# EAGLE board lcd_brd (EAGLE 6.2)
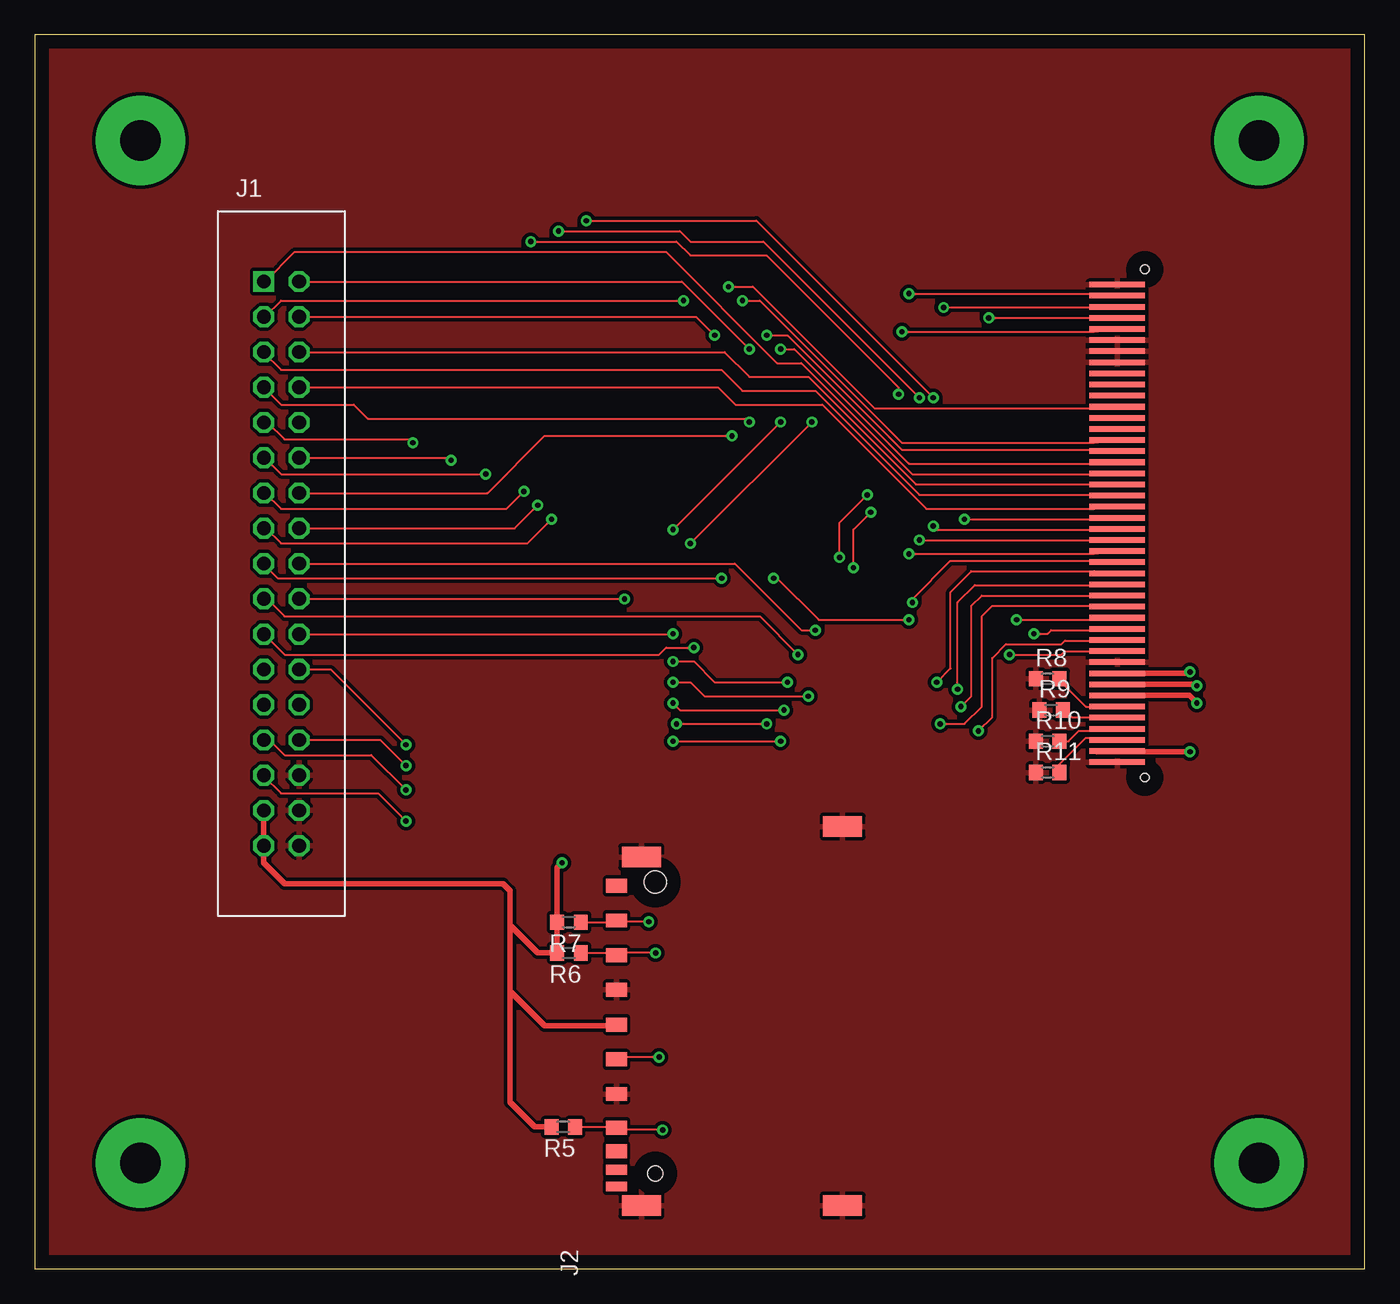
[diagram p0: board, top side]
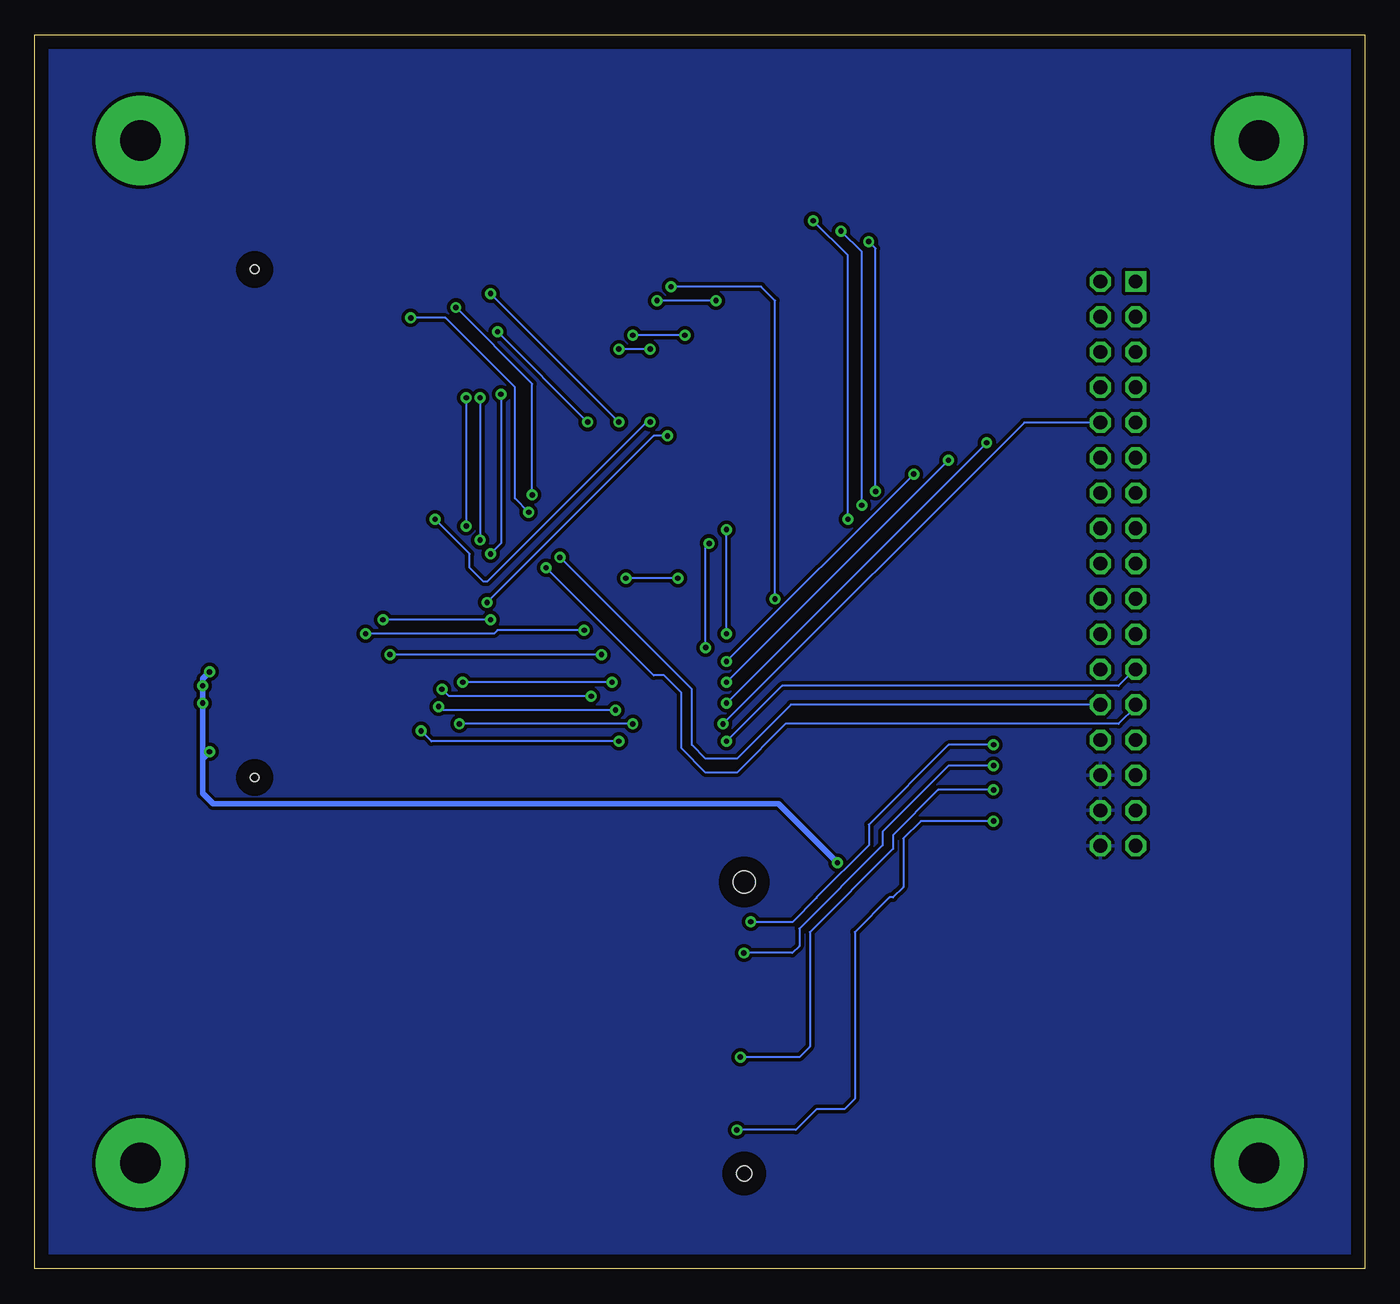
[diagram p1: board, bottom side, seen from below]

Size 95.85 x 88.9 mm. Coordinates in mm from the lower left corner, seen from the top.
Outline: 0,0 95.85,0 95.85,88.9 0,88.9 0,0
Copper layers (1*16): Top 0.035mm / dielectric 1.5mm / Bottom 0.035mm
Design rules: minimum track width 6mil, minimum drill 15mil, track to track 6mil, track to pad 6mil, pad to pad 6mil, via to via 6mil, smd to smd 6mil, copper to edge 40mil, drill to drill 8mil, minimum pad ring 10mil, minimum via ring 8mil, stop-mask expansion 4mil, vias tented up to drill 0mil, thermal gap 10mil

## Footprints (pad centres in the part's own frame; a part is rotated, then mirrored left to right if it is on the bottom)
SBH11-PBPC-D17-ST-BK = drill 0.991 square: 1 0,0 | drill 0.991 octagon: 2 2.54,0; 3 0,-2.54; 4 2.54,-2.54; 5 0,-5.08; 6 2.54,-5.08; 7 0,-7.62; 8 2.54,-7.62; 9 0,-10.16; 10 2.54,-10.16; 11 0,-12.7; 12 2.54,-12.7; 13 0,-15.24; 14 2.54,-15.24; 15 0,-17.78; 16 2.54,-17.78; 17 0,-20.32; 18 2.54,-20.32; 19 0,-22.86; 20 2.54,-22.86; 21 0,-25.4; 22 2.54,-25.4; 23 0,-27.94; 24 2.54,-27.94; 25 0,-30.48; 26 2.54,-30.48; 27 0,-33.02; 28 2.54,-33.02; 29 0,-35.56; 30 2.54,-35.56; 31 0,-38.1; 32 2.54,-38.1; 33 0,-40.64; 34 2.54,-40.64
101-00708-64 = smd 1 x 1.5: 1 20.53,16.29; 2 18.03,16.29; 3 15.53,16.29; 4 13.03,16.29; 5 10.53,16.29; 6 8.03,16.29; 7 5.61,16.29; 8 3.91,16.29; 9 23.03,16.29 | smd 1.5 x 2.8: CGND1 0,14.5; CGND2 25.1,14.5; CGND3 0,0; CGND4 27.3,0 | smd 0.7 x 1.5: ICD 2.57,16.29; WP 1.37,16.29 | hole 1.1: 2.3,13.5 | hole 1.6: 23.3,13.5
R0603 = smd 1 x 1.1: 1 -0.85,0; 2 0.85,0
ST0240Y3WY-RSLW-F = smd 4 x 0.4: 1 0,34.4; 2 0,33.6; 3 0,32.8; 4 0,32; 5 0,31.2; 6 0,30.4; 7 0,29.6; 8 0,28.8; 9 0,28; 10 0,27.2; 11 0,26.4; 12 0,25.6; 13 0,24.8; 14 0,24; 15 0,23.2; 16 0,22.4; 17 0,21.6; 18 0,20.8; 19 0,20; 20 0,19.2; 21 0,18.4; 22 0,17.6; 23 0,16.8; 24 0,16; 25 0,15.2; 26 0,14.4; 27 0,13.6; 28 0,12.8; 29 0,12; 30 0,11.2; 31 0,10.4; 32 0,9.6; 33 0,8.8; 34 0,8; 35 0,7.2; 36 0,6.4; 37 0,5.6; 38 0,4.8; 39 0,4; 40 0,3.2; 41 0,2.4; 42 0,1.6; 43 0,0.8; 44 0,0 | hole 0.6: 2,-1.1; 2,35.5

## Placement (x,y rotation side)
J1  SBH11-PBPC-D17-ST-BK  [SBH11-PBPC-D17-ST-BK]  16.51,71.12 0 top
J2  101-00708-64  [101-00708-64]  58.22,4.56 90 top
R5  50k  [R0603]  38.09,10.22 180 top
R6  50k  [R0603]  38.5,22.75 180 top
R7  50k  [R0603]  38.5,24.97 180 top
R8  22  [R0603]  73,42.5 0 top
R9  22  [R0603]  73.25,40.25 0 top
R10  22  [R0603]  73,38 0 top
R11  22  [R0603]  73,35.75 0 top
U$1  ST2040Y3WY-RSLW-F  [ST0240Y3WY-RSLW-F]  78,36.5 0 top

## Library data of the parts
J1 = SBH11-PBPC-D17-ST-BK
J2 = 101-00708-64
R5-R11 = resistor
U$1 = ST2040Y3WY-RSLW-F

## Nets
A0: J1.23 U$1.33
DB0: J1.10 U$1.30
DB1: J1.9 U$1.29
DB2: J1.12 U$1.28
DB3: J1.11 U$1.27
DB4: J1.14 U$1.26
DB5: J1.13 U$1.25
DB6: J1.16 U$1.24
DB7: J1.15 U$1.23
DB10: J1.7 U$1.22
DB11: J1.8 U$1.21
DB12: J1.5 U$1.20
DB13: J1.6 U$1.19
DB14: J1.1 U$1.18
DB15: J1.2 U$1.17
DB16: J1.4 U$1.16
DB17: J1.3 U$1.15
DGND: J1.30 J1.32 J1.34 J2.3 J2.6 J2.CGND1 J2.CGND2 J2.CGND3 J2.CGND4 R8.1 R9.1 R10.1 R11.1 U$1.1 U$1.6 U$1.7 U$1.8 U$1.35 U$1.44
LCD_CS: J1.19 U$1.34
LCD_RD: J1.17 U$1.31
LCD_RST: J1.20 U$1.12
LCD_WR: J1.18 U$1.32
N$12: R8.2 U$1.39
N$13: R9.2 U$1.40
N$14: R10.2 U$1.41
N$15: R11.2 U$1.42
SD_CSN: J1.24 J2.1 R7.1
SD_SP_MISO: J1.29 J2.7 R5.1
SD_SP_MOSI: J1.28 J2.2 R6.1
SD_SP_SCK: J1.27 J2.5
VCC: J1.31 J1.33 J2.4 R5.2 R6.2 R7.2 U$1.36 U$1.37 U$1.38 U$1.43
X+: J1.26 U$1.3
X-: J1.21 U$1.5
Y+: J1.25 U$1.4
Y-: J1.22 U$1.2

## Tracks (layer width: path | path; a pad name or v marks a point on that pad's centre or on a via)
A0  (via drill 0.38)
  Top 0.152: v46,38 v53.75,38 | v68,38.75 69,39.75 69,44 70,45 74,45 74.25,45.25 76.45,45.25 U$1.33
  Bottom 0.152: J1.23 16.57,43.18 17.75,42 42,42 v46,38 | v53.75,38 67.25,38 v68,38.75
DB0  (via drill 0.38)
  Top 0.152: v46.25,39.25 v52.75,39.25 | v65.25,39.25 67,39.25 68.25,40.5 68.25,47 69,47.75 76.45,47.75 U$1.30
  Bottom 0.152: J1.10 24.54,60.96 v46.25,39.25 | v52.75,39.25 v65.25,39.25
DB1  (via drill 0.38)
  Top 0.152: J1.9 16.79,60.96 18,59.75 27,59.75 v27.25,59.5 | v46,40.75 46.5,40.25 v54,40.25 | v66.75,40.5 67.5,41.25 67.5,47.75 68.25,48.5 U$1.29
  Bottom 0.152: v27.25,59.5 v46,40.75 | v54,40.25 66.5,40.25 v66.75,40.5
DB2  (via drill 0.38)
  Top 0.152: J1.12 29.83,58.42 v30,58.25 | v46,42.25 47.25,42.25 48.25,41.25 v55.75,41.25 | v66.5,41.75 66.5,48 67.75,49.25 76.45,49.25 U$1.28
  Bottom 0.152: v30,58.25 v46,42.25 | v55.75,41.25 66,41.25 v66.5,41.75
DB3  (via drill 0.38)
  Top 0.152: J1.11 16.58,58.42 17.75,57.25 v32.5,57.25 | v46,43.75 47.5,43.75 49,42.25 v54.25,42.25 | v65,42.25 66,43.25 66,48.75 67.5,50.25 76.35,50.25 U$1.27
  Bottom 0.152: v32.5,57.25 v46,43.75 | v54.25,42.25 v65,42.25
DB4  (via drill 0.38)
  Top 0.152: J1.14 32.63,55.88 36.75,60 v50.25,60 | v63.25,48 63.25,48.25 66,51 76.4,51 U$1.26
  Bottom 0.152: v50.25,60 51.25,60 v63.25,48
DB5  (via drill 0.38)
  Top 0.152: J1.13 16.62,55.88 17.75,54.75 34,54.75 v35.25,56 | v35.75,74 46.25,74 47.25,73 52.75,73 62.25,63.5 v62.25,63 | v63,51.5 76.3,51.5 U$1.25
  Bottom 0.152: v35.25,56 35.25,73.5 v35.75,74 | v62.25,63 62.25,52.25 v63,51.5
DB6  (via drill 0.38)
  Top 0.152: J1.16 34.59,53.34 v36.25,55 | v37.75,74.75 46.5,74.75 47.25,74 52.5,74 v63.75,62.75 | v63.75,52.5 U$1.24
  Bottom 0.152: v36.25,55 36.25,73.25 v37.75,74.75 | v63.75,62.75 v63.75,52.5
DB7  (via drill 0.38)
  Top 0.152: J1.15 16.66,53.34 17.75,52.25 35.5,52.25 v37.25,54 | v39.75,75.5 52,75.5 v64.75,62.75 | v64.75,53.5 65,53.25 76.45,53.25 U$1.23
  Bottom 0.152: v37.25,54 37.25,73 v39.75,75.5 | v64.75,62.75 v64.75,53.5
DB10  (via drill 0.38)
  Top 0.152: J1.7 17.75,62.25 23,62.25 24,61.25 51.25,61.25 v51.5,61 | v67,54 76.4,54 U$1.22
  Bottom 0.152: v51.5,61 51.75,61 63.25,49.5 63.5,49.5 64.5,50.5 64.5,51.5 v67,54
DB11
  Top 0.152: J1.8 49.25,63.5 50.5,62.25 56.75,62.25 64.25,54.75 76.35,54.75 U$1.21
DB12
  Top 0.152: J1.5 16.51,65.99 17.75,64.75 49.5,64.75 51,63.25 56.25,63.25 63.75,55.75 76.45,55.75 U$1.20
DB13
  Top 0.152: J1.6 49.71,66.04 51.5,64.25 55.75,64.25 63.5,56.5 U$1.19
DB14
  Top 0.152: J1.1 16.62,71.12 18.75,73.25 45.5,73.25 53.5,65.25 55.25,65.25 63.25,57.25 76.45,57.25 U$1.18
DB15  (via drill 0.38)
  Top 0.152: J1.2 46.63,71.12 v51.5,66.25 | v53.75,66.25 54.75,66.25 63,58 76.4,58 U$1.17
  Bottom 0.152: v51.5,66.25 v53.75,66.25
DB16  (via drill 0.38)
  Top 0.152: J1.4 47.67,68.58 v49,67.25 | v52.75,67.25 54.25,67.25 62.5,59 76.4,59 U$1.16
  Bottom 0.152: v49,67.25 v52.75,67.25
DB17  (via drill 0.38)
  Top 0.152: J1.3 16.58,68.58 17.75,69.75 v46.75,69.75 | v51,69.75 52.25,69.75 62.5,59.5 76.3,59.5 U$1.15
  Bottom 0.152: v46.75,69.75 v51,69.75
DGND
  pour Top (isolate 0.254): 0,89 95.75,89 96,0 0,0
  pour Bottom (isolate 0.254): 0,88.75 0.75,0 96.5,0 95.75,89 0,89
LCD_CS  (via drill 0.38)
  Top 0.152: J1.19 16.74,48.26 18,47 52.25,47 v55,44.25 | v70.25,44.25 74,44.25 74.25,44.5 U$1.34
  Bottom 0.152: v55,44.25 v70.25,44.25
LCD_RD  (via drill 0.38)
  Top 0.152: J1.17 16.51,50.74 17.5,49.75 v49.5,49.75 | v53.25,49.75 53.5,49.75 56.5,46.75 v63,46.75 | v70.75,46.75 76.35,46.75 U$1.31
  Bottom 0.152: v49.5,49.75 v53.25,49.75 | v63,46.75 v70.75,46.75
LCD_RST  (via drill 0.38)
  Top 0.152: J1.20 v42.49,48.26 v42.5,48.25 | v50,70.75 51.75,70.75 60.5,62 76.4,62 U$1.12
  Bottom 0.152: v42.5,48.25 42.5,69.75 43.5,70.75 v50,70.75
LCD_WR  (via drill 0.38)
  Top 0.152: J1.18 50.45,50.8 55.25,46 v56.25,46 | v72,45.75 73,45.75 73.25,46 76.4,46 U$1.32
  Bottom 0.152: v56.25,46 62.5,46 62.75,45.75 v72,45.75
N$2  (via drill 2.95 pad 6.45)
  other vias: 7.62,81.28
N$5  (via drill 2.95 pad 6.45)
  other vias: 88.23,81.28
N$7  (via drill 2.95 pad 6.45)
  other vias: 88.23,7.62
N$8  (via drill 2.95 pad 6.45)
  other vias: 7.62,7.62
N$12
  Top 0.152: R8.2 74,42.25 75.75,40.5 U$1.39
N$13
  Top 0.152: R9.2 74.25,40.25 74.75,39.75 76.45,39.75 U$1.40
N$14
  Top 0.152: R10.2 74.5,38 75.25,38.75 76.35,38.75 U$1.41
N$15
  Top 0.152: R11.2 73.85,36.35 75.75,38.25 76.35,38.25 U$1.42
SD_CSN  (via drill 0.38)
  Top 0.152: R7.1 41.81,24.97 | J1.24 21.32,43.18 v26.75,37.75 | v44.25,25 42.02,25 J2.1
  Top 0.406: 41.81,24.97 J2.1
  Bottom 0.152: v26.75,37.75 30,37.75 35.75,32 35.75,30.5 39.5,26.75 39.5,26.72 41.25,24.97 44.22,24.97 v44.25,25
SD_SP_MISO  (via drill 0.38)
  Top 0.152: J1.29 16.51,35.49 17.75,34.25 24.75,34.25 v26.75,32.25 | v45.25,10 42.1,10 J2.7 41.88,10.22 R5.1
  Bottom 0.152: v26.75,32.25 32,32.25 33.25,31 33.25,27.5 34,26.75 34.25,26.75 36.75,24.25 36.75,12.25 37.5,11.5 39.5,11.5 41,10 v45.25,10
SD_SP_MOSI  (via drill 0.38)
  Top 0.152: R6.1 41.77,22.75 | J1.28 24.9,38.1 v26.75,36.25 | v44.75,22.75 42.09,22.75 J2.2
  Top 0.406: 41.77,22.75 J2.2
  Bottom 0.152: v26.75,36.25 30,36.25 34.75,31.5 34.75,30.5 40.75,24.5 40.75,23.25 41.25,22.75 v44.75,22.75 44.5,22.5
SD_SP_SCK  (via drill 0.38)
  Top 0.152: J1.27 16.9,38.1 18,37 24.25,37 v26.75,34.5 | v45,15.25 42.09,15.25 J2.5
  Bottom 0.152: v26.75,34.5 30.75,34.5 34,31.25 34,30.25 40,24.25 40,16 40.75,15.25 v45,15.25
VCC  (via drill 0.38)
  Top 0.406: J1.33 J1.31 16.5,33 16.5,29.25 18,27.75 33.75,27.75 34.25,27.25 34.25,24.75 | 34.25,24.75 34.25,20 | 34.25,20 36.75,17.5 41.84,17.5 J2.4 | R5.2 36.03,10.22 34.25,12 34.25,20 | 34.25,24.75 36.25,22.75 R6.2 R7.2 37.65,28.9 v38,29.25 | v83.25,37.25 76.55,37.25 U$1.43 | U$1.36 83.15,42.9 v83.25,43 | U$1.38 83.2,41.3 v83.75,40.75 | U$1.37 83.65,42.1 v83.75,42
  Bottom 0.406: 83.75,36.75 83.75,34.25 83,33.5 63.25,33.5 62.25,33.5 42.25,33.5 v38,29.25 | 83.75,36.75 v83.25,37.25 | v83.25,43 83.75,42.5 v83.75,42 v83.75,40.75 83.75,36.75
X+  (via drill 0.38)
  Top 0.152: v58,51.25 58,53.75 v60,55.75 | v65.5,69.25 76.45,69.25 U$1.3
  Bottom 0.152: J1.26 41.36,40.64 45.25,36.75 47.5,36.75 48.5,37.75 48.5,41.75 v58,51.25 | v60,55.75 60,63.75 v65.5,69.25
X-  (via drill 0.38)
  Top 0.152: J1.21 16.53,45.72 18,44.25 45,44.25 45.5,44.75 v47.5,44.75 | v47.25,52.25 v56,61 | v62.5,67.5 76.3,67.5 U$1.5
  Bottom 0.152: v47.5,44.75 47.5,52 v47.25,52.25 | v56,61 v62.5,67.5
Y+  (via drill 0.38)
  Top 0.152: v59,50.5 59,53.25 v60.25,54.5 | v68.75,68.5 U$1.4
  Bottom 0.152: J1.25 16.51,40.49 17.75,39.25 41.75,39.25 45.25,35.75 47.5,35.75 49.25,37.5 49.25,41.5 50.5,42.75 51.25,42.75 v59,50.5 | v60.25,54.5 61.25,55.5 61.25,63.5 66.25,68.5 v68.75,68.5
Y-  (via drill 0.38)
  Top 0.152: J1.22 45.97,45.72 v46,45.75 | v46,53.25 v53.75,61 | v63,70.25 76.35,70.25 U$1.2
  Bottom 0.152: v46,45.75 v46,53.25 | v53.75,61 v63,70.25